# EAGLE board Charge Board.job (EAGLE 6.4)
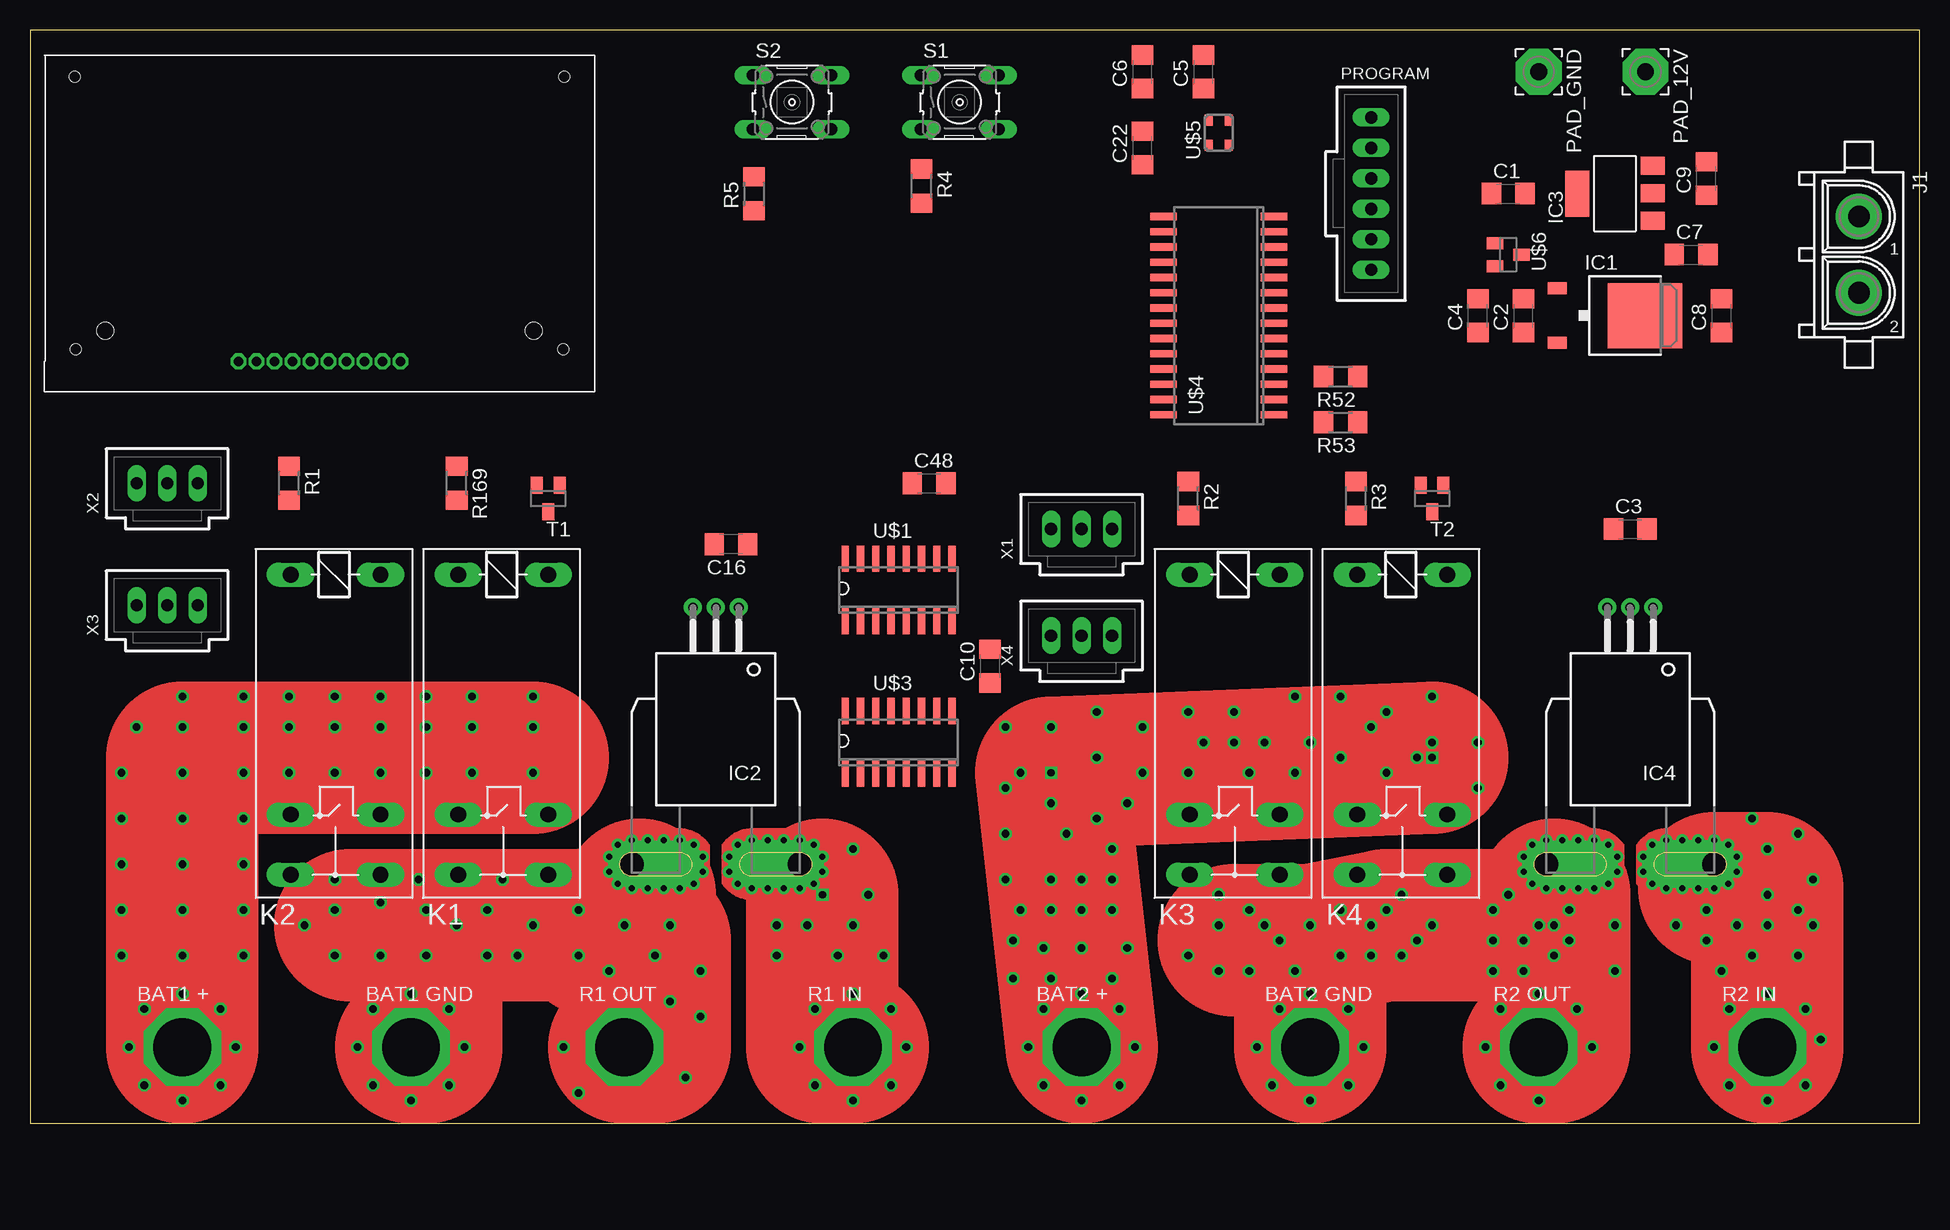
[diagram p0: board, top side]
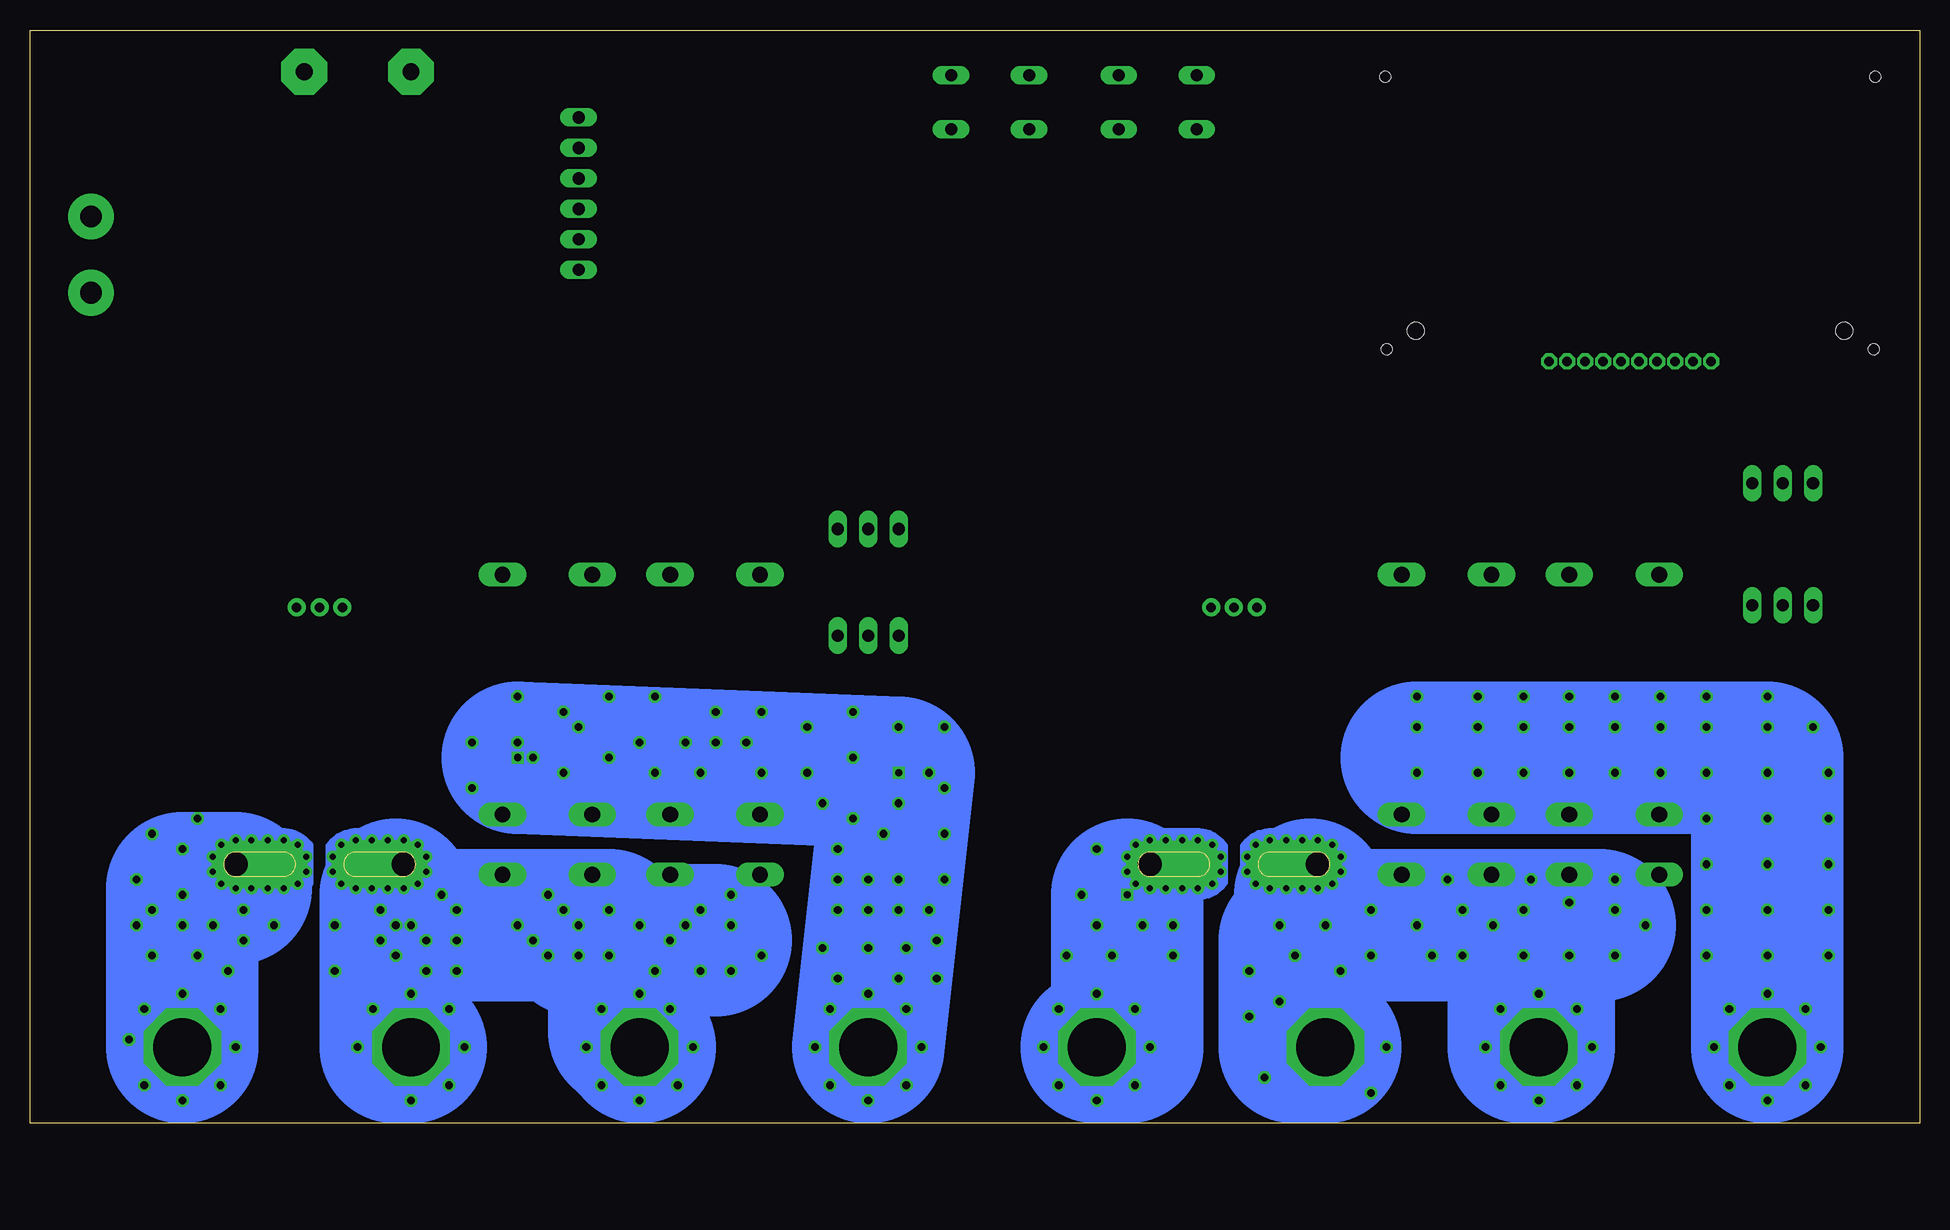
[diagram p1: board, bottom side, seen from below]

Size 157.46 x 91.11 mm. Coordinates in mm from the lower left corner, seen from the top.
Outline: 0,0 157.46,0 157.46,91.11 0,91.11 0,0
Copper layers (1*16): Top 0.035mm / dielectric 1.5mm / Bottom 0.035mm
Design rules "SJ Design Rules": minimum track width 16mil, minimum drill 24mil, track to track 10mil, track to pad 10mil, pad to pad 10mil, via to via 10mil, smd to smd 10mil, copper to edge 40mil, drill to drill 10mil, minimum pad ring 10mil, minimum via ring 8mil, stop-mask expansion 4mil, vias tented up to drill 0mil, thermal gap 20mil

## Footprints (pad centres in the part's own frame; a part is rotated, then mirrored left to right if it is on the bottom)
SOLDERPAD = drill 4.826 pad 6.452 octagon: P$1 0,0
C1206 = smd 1.6 x 1.8: 1 -1.4,0; 2 1.4,0
TO252 = smd 1 x 1.6: 1 -2.28,-4.8; 2 2.28,-4.8 | smd 5.4 x 6.2: 3 0,2.5
CB-PFF = drill 0.8 pad 1.5: 1 -1.91,-21.4; 2 0,-21.4; 3 1.91,-21.4 | drill 2 pad 4 offset: IP+ 7,0; IP- -7,0 | drill 0.5 pad 0.9: IP+@2 8.89,0.635; IP+@3 8.89,-0.635; IP+@4 8.175,-1.625; IP+@5 7,-2; IP+@6 5.675,-2; IP+@7 4.35,-2; IP+@8 3,-2; IP+@9 1.825,-1.625; IP+@10 1.1,-0.625; IP+@11 1.1,0.625; IP+@12 1.825,1.625; IP+@13 3,2; IP+@14 4.35,2; IP+@15 5.675,2; IP+@16 7,2; IP+@17 8.175,1.625; IP-@2 -8.89,0.635; IP-@3 -8.89,-0.635; IP-@4 -8.175,-1.625; IP-@5 -7,-2; IP-@6 -5.675,-2; IP-@7 -4.325,-2; IP-@8 -3,-2; IP-@9 -1.825,-1.625; IP-@10 -1.1,-0.625; IP-@11 -1.1,0.625; IP-@12 -1.825,1.625; IP-@13 -3,2; IP-@14 -4.325,2; IP-@15 -5.675,2; IP-@16 -7,2; IP-@17 -8.175,1.625
SOT223 = smd 1.499 x 2.007: 1 -2.261,-3.15; 2 0.025,-3.15; 3 2.311,-3.15 | smd 3.81 x 2.007: 4 0,3.15
350428-1 = drill 1.8 pad 3.81: 1 -3.175,0; 2 3.175,0
G2REA = drill 1.321 long: 1 -2.54,-3.683; 2 -2.54,3.81; P 17.45,-3.683; P@ 17.45,3.81; S 22.454,-3.683; S@ 22.454,3.81
3,81/1,4 = drill 1.397 pad 3.81 octagon: 1 0,0
70543-06 = drill 1.016 long: 1 -6.35,0; 2 -3.81,0; 3 -1.27,0; 4 1.27,0; 5 3.81,0; 6 6.35,0
R1206 = smd 1.6 x 1.803: 1 -1.422,0; 2 1.422,0
B3F-10XX = drill 1.016 long: 1 -3.251,2.261; 2 3.251,2.261; 3 -3.251,-2.261; 4 3.251,-2.261
SOT23 = smd 1 x 1.4: 1 -0.95,-1.1; 2 0.95,-1.1; 3 0,1.1
SO16 = smd 0.6 x 2.2: 1 -4.445,-2.6; 2 -3.175,-2.6; 3 -1.905,-2.6; 4 -0.635,-2.6; 5 0.635,-2.6; 6 1.905,-2.6; 7 3.175,-2.6; 8 4.445,-2.6; 9 4.445,2.6; 10 3.175,2.6; 11 1.905,2.6; 12 0.635,2.6; 13 -0.635,2.6; 14 -1.905,2.6; 15 -3.175,2.6; 16 -4.445,2.6
LCD_SCREEN = drill 0.8 octagon: 1 -6.75,0; 2 -5.25,0; 3 -3.75,0; 4 -2.25,0; 5 -0.75,0; 6 0.75,0; 7 2.25,0; 8 3.75,0; 9 5.25,0; 10 6.75,0 | hole 0.9: 20.3,1; -20.3,1; 20.4,23.7; -20.4,23.7 | hole 1.4: 17.85,2.55; -17.85,2.55
SO28W = smd 0.6 x 2.2: 1 -8.255,-4.6; 2 -6.985,-4.6; 3 -5.715,-4.6; 4 -4.445,-4.6; 5 -3.175,-4.6; 6 -1.905,-4.6; 7 -0.635,-4.6; 8 0.635,-4.6; 9 1.905,-4.6; 10 3.175,-4.6; 11 4.445,-4.6; 12 5.715,-4.6; 13 6.985,-4.6; 14 8.255,-4.6; 15 8.255,4.6; 16 6.985,4.6; 17 5.715,4.6; 18 4.445,4.6; 19 3.175,4.6; 20 1.905,4.6; 21 0.635,4.6; 22 -0.635,4.6; 23 -1.905,4.6; 24 -3.175,4.6; 25 -4.445,4.6; 26 -5.715,4.6; 27 -6.985,4.6; 28 -8.255,4.6
ASE = smd 0.9 x 0.65: 1 -1.05,-0.825; 2 1.05,-0.825; 3 1.05,0.825; 4 -1.05,0.825
70543-03 = drill 1.016 long: 1 -2.54,0; 2 0,0; 3 2.54,0

## Placement (x,y rotation side)
BAT+_1  BAT1 +  [SOLDERPAD]  12.7,6.35 0 top
BAT+_2  BAT2 +  [SOLDERPAD]  87.63,6.35 0 top
BAT-_1  BAT1 GND  [SOLDERPAD]  31.75,6.35 0 top
BAT-_2  BAT2 GND  [SOLDERPAD]  106.68,6.35 0 top
C1  .3uF  [C1206]  123.19,77.47 0 top
C2  1uF  [C1206]  124.46,67.31 90 top
C3  1uF  [C1206]  133.35,49.53 0 top
C4  1uF  [C1206]  120.65,67.31 90 top
C5  1uF  [C1206]  97.79,87.63 90 top
C6  1uF  [C1206]  92.71,87.63 90 top
C7  1uF  [C1206]  138.43,72.39 0 top
C8  1uF  [C1206]  140.97,67.31 90 top
C9  1uF  [C1206]  139.7,78.74 90 top
C10  1uF  [C1206]  80.01,38.1 90 top
C16  .1uF  [C1206]  58.42,48.26 180 top
C22  1uF  [C1206]  92.71,81.28 90 top
C48  .1uF  [C1206]  74.93,53.34 0 top
IC1  7805DT  [TO252]  132.08,67.31 270 top
IC2  ACS758ECB-200B-PFF-T  [CB-PFF]  57.15,21.59 180 top
IC3  REG1117  [SOT223]  132.08,77.47 90 top
IC4  ACS758ECB-200B-PFF-T  [CB-PFF]  133.35,21.59 180 top
J1  350428-1  [350428-1]  152.4,72.39 270 top
K1  G2REA  [G2REA]  39.37,43.18 270 top
K2  G2REA  [G2REA]  25.4,43.18 270 top
K3  G2REA  [G2REA]  100.33,43.18 270 top
K4  G2REA  [G2REA]  114.3,43.18 270 top
PAD_12V  12v  [3,81/1,4]  134.62,87.63 180 top
PAD_GND  gnd  [3,81/1,4]  125.73,87.63 180 top
PROGRAM  C-GRID-06-70543  [70543-06]  111.76,77.47 270 top
R1  1K  [R1206]  21.59,53.34 270 top
R2  1K  [R1206]  96.52,52.07 270 top
R3  1K  [R1206]  110.49,52.07 270 top
R4  1K  [R1206]  74.3,78.11 270 top
R5  1K  [R1206]  60.33,77.47 90 top
R52  10k\  [R1206]  109.22,62.23 180 top
R53  470  [R1206]  109.22,58.42 180 top
R169  1K  [R1206]  35.56,53.34 270 top
R_IN_1  R1 IN  [SOLDERPAD]  68.58,6.35 0 top
R_IN_2  R2 IN  [SOLDERPAD]  144.78,6.35 0 top
R_OUT_1  R1 OUT  [SOLDERPAD]  49.53,6.35 0 top
R_OUT_2  R2 OUT  [SOLDERPAD]  125.73,6.35 0 top
S1  [B3F-10XX]  77.47,85.09 0 top
S2  [B3F-10XX]  63.5,85.09 0 top
T1  PMV56XN  [SOT23]  43.18,52.07 180 top
T2  PMV56XN  [SOT23]  116.84,52.07 180 top
U$1  MCP-3008  [SO16]  72.39,44.45 0 top
U$2  LCD_SCREEN  [LCD_SCREEN]  24.13,63.5 0 top
U$3  SP720APP  [SO16]  72.39,31.75 0 top
U$4  PIC24HJ128GP-202  [SO28W]  99.06,67.31 90 top
U$5  ASE  [ASE]  99.06,82.55 90 top
U$6  MAX6105  [SOT23]  123.19,72.39 270 top
X1  BAT2 TEMP 1  [70543-03]  87.63,49.53 0 top
X2  BAT1 TEMP1  [70543-03]  11.43,53.34 0 top
X3  BAT1 TEMP2  [70543-03]  11.43,43.18 0 top
X4  BAT2 TEMP2  [70543-03]  87.63,40.64 0 top

## Library data of the parts
BAT+_1 BAT+_2 BAT-_1 BAT-_2 R_IN_1 R_IN_2 R_OUT_1 R_OUT_2 U$1 U$3 U$6 = SolarJackets_Common
C1-C10 C16 C22 C48 R1-R5 R52 R53 R169 = rcl
IC1 = linear
IC2 IC4 = allegro; MPN: ACS758ECB-200B-PFF-T; OC_FARNELL: 1718993; OC_NEWARK: 04R7127
IC3 = burr-brown; MPN: REG1117; OC_FARNELL: 1097566; OC_NEWARK: 14P6981
J1 = con-amp
K1-K4 = relay; OC_FARNELL: unknown; OC_NEWARK: unknown
PAD_12V PAD_GND = wirepad
PROGRAM X1-X4 = con-molex; OC_FARNELL: unknown; OC_NEWARK: unknown
S1 S2 = switch-omron; MPN: B3F-1000; OC_FARNELL: 176432; OC_NEWARK: 36M3542
T1 T2 = SolarJacketsADC; PART_NUM: PMV56XN,215
U$2 = LCD_SCREEN
U$4 = LTC6803
U$5 = crystal; OC_FARNELL: unknown; OC_NEWARK: unknown

## Nets
+3V3: C9.1 C16.1 C48.1 IC3.2 PROGRAM.6 R4.2 R5.1 R52.1 U$2.7 U$4.13 U$4.28 U$5.1 U$5.4
+5V: C3.2 C4.1 C7.1 C10.2 IC1.2 IC2.1 IC4.1 U$1.15 U$1.16 U$3.16 U$6.2 X1.3 X2.3 X3.3 X4.3
+12V: C1.1 C2.1 C8.1 IC1.1 IC3.3 J1.2 PAD_12V.1 R1.2 R2.2 R3.2 R169.2 U$6.1
CH0: IC2.3 U$1.1 U$3.1
CH1: U$1.2 U$3.2 X2.2
CH2: U$1.3 U$3.3 X3.2
CH3: K1.S K1.S@ K2.S K2.S@ R_OUT_1.P$1 U$1.4 U$3.4
CH4: IC4.3 U$1.5 U$3.5
CH5: U$1.6 U$3.6 X1.2
CH6: U$1.7 U$3.7 X4.2
CH7: K3.S K3.S@ K4.S K4.S@ R_OUT_2.P$1 U$1.8 U$3.15
GND: BAT-_1.P$1 BAT-_2.P$1 C1.2 C2.2 C3.1 C4.2 C6.1 C7.2 C8.2 C9.2 C10.1 C16.2 C22.2 C48.2 IC1.3 IC2.2 IC2.IP+ IC2.IP+@2 IC2.IP+@3 IC2.IP+@4 IC2.IP+@5 IC2.IP+@6 IC2.IP+@7 IC2.IP+@8 IC2.IP+@9 IC2.IP+@10 IC2.IP+@11 IC2.IP+@12 IC2.IP+@13 IC2.IP+@14 IC2.IP+@15 IC2.IP+@16 IC2.IP+@17 IC3.1 IC4.2 IC4.IP+ IC4.IP+@2 IC4.IP+@3 IC4.IP+@4 IC4.IP+@5 IC4.IP+@6 IC4.IP+@7 IC4.IP+@8 IC4.IP+@9 IC4.IP+@10 IC4.IP+@11 IC4.IP+@12 IC4.IP+@13 IC4.IP+@14 IC4.IP+@15 IC4.IP+@16 IC4.IP+@17 J1.1 PAD_GND.1 PROGRAM.5 R52.2 R53.1 S1.1 S1.2 S2.1 S2.2 T1.2 T2.2 U$1.9 U$1.14 U$2.6 U$3.8 U$4.8 U$4.19 U$4.27 U$5.2 U$6.3 X1.1 X2.1 X3.1 X4.1
MCLR: PROGRAM.4 R53.2 U$4.1
N$1: K1.2 K2.2 T1.3
N$2: K2.1 R1.1
N$3: BAT+_2.P$1 K3.P K3.P@ K4.P K4.P@
N$4: K3.1 R2.1
N$5: K3.2 K4.2 T2.3
N$6: K4.1 R3.1
N$7: IC4.IP- IC4.IP-@2 IC4.IP-@3 IC4.IP-@4 IC4.IP-@5 IC4.IP-@6 IC4.IP-@7 IC4.IP-@8 IC4.IP-@9 IC4.IP-@10 IC4.IP-@11 IC4.IP-@12 IC4.IP-@13 IC4.IP-@14 IC4.IP-@15 IC4.IP-@16 IC4.IP-@17 R_IN_2.P$1
N$13: IC2.IP- IC2.IP-@2 IC2.IP-@3 IC2.IP-@4 IC2.IP-@5 IC2.IP-@6 IC2.IP-@7 IC2.IP-@8 IC2.IP-@9 IC2.IP-@10 IC2.IP-@11 IC2.IP-@12 IC2.IP-@13 IC2.IP-@14 IC2.IP-@15 IC2.IP-@16 IC2.IP-@17 R_IN_1.P$1
N$20: C6.2 U$2.8
N$21: C5.2 U$2.9
N$22: C5.1 U$2.10
N$48: C22.1 U$4.20
N$172: K1.1 R169.1
N$278: BAT+_1.P$1 K1.P K1.P@ K2.P K2.P@
OSC1: PROGRAM.1 U$4.9 U$5.3
PGEC1: PROGRAM.2 U$4.5
PGED1: PROGRAM.3 U$4.4
RA0: U$4.2
RA1: U$4.3
RA3: U$4.10
RA4: U$4.12
RB2: R5.2 S2.3 S2.4 U$4.6
RB3: R4.1 S1.3 S1.4 U$4.7
RB4: T2.1 U$4.11
RB5: T1.1 U$4.14
RB6: U$1.13 U$4.15
RB7: U$1.12 U$4.16
RB8: U$1.11 U$4.17
RB9: U$1.10 U$4.18
RB10: U$2.5 U$4.21
RB11: U$2.4 U$4.22
RB12: U$2.3 U$4.23
RB13: U$2.2 U$4.24
RB14: U$2.1 U$4.25
RB15: U$4.26

## Tracks (layer width: path | path; a pad name or v marks a point on that pad's centre or on a via)
CH3  (via drill 0.64)
  Top 12.7: R_OUT_1.P$1 52.07,6.35 v52.07,13.97 52.07,15.24 46.99,15.24 45.72,16.51 | 45.72,16.51 39.37,16.51 | 45.72,16.51 48.26,16.51 50.8,19.05
  Bottom 12.7: R_OUT_1.P$1 52.07,6.35 v52.07,13.97 52.07,15.24
CH7  (via drill 0.64)
  Top 12.7: 127,19.05 v127,13.97 127,6.35 R_OUT_2.P$1
  Bottom 12.7: 127,6.35 v127,13.97 | 127,19.05 v127,13.97 | v127,13.97 127,7.62 R_OUT_2.P$1
GND  (via drill 0.64)
  Top 12.7: 33.02,16.51 26.67,16.51 | 33.02,16.51 v33.02,13.97 33.02,6.35 BAT-_1.P$1 | 33.02,16.51 v35.56,16.51 38.73,16.51 | BAT-_2.P$1 v106.68,10.79 106.68,15.24 | 106.68,15.24 v104.14,15.24 100.33,15.24 | 106.68,15.24 113.03,16.51 v127,16.51
  Bottom 12.7: 31.75,16.51 v35.56,16.51 v49.53,16.51 50.8,16.51 50.8,19.05 | 26.67,16.51 31.75,16.51 | 31.75,16.51 v31.75,10.79 BAT-_1.P$1 33.02,6.35 33.02,11.43 | 100.33,15.24 v104.14,15.24 107.95,15.24 | 107.95,15.24 110.49,15.24 | 110.49,15.24 111.76,15.24 113.03,16.51 v111.76,16.51 | v111.76,16.51 109.22,16.51 107.95,15.24 | 107.95,15.24 107.95,7.62 BAT-_2.P$1 | v127,16.51 v111.76,16.51 | v111.76,16.51 110.49,15.24
N$3  (via drill 0.6)
  Top 12.7: BAT+_2.P$1 v85.09,29.21 v116.84,30.48
  Bottom 12.7: BAT+_2.P$1 v85.09,29.21 v116.84,30.48
N$7  (via drill 0.64)
  Top 12.7: IC4.IP-@16 144.78,19.59 v144.78,19.05 v144.78,16.51 v144.78,10.79 R_IN_2.P$1
  Bottom 12.7: IC4.IP-@16 144.78,19.59 v144.78,19.05 v144.78,16.51 v144.78,10.79 R_IN_2.P$1
N$8  (via drill 0.64)
  other vias: 7.62,13.97
N$9  (via drill 0.64)
  other vias: 17.78,13.97
N$10  (via drill 0.64)
  other vias: 17.78,17.78
N$11  (via drill 0.64)
  other vias: 7.62,17.78
N$12  (via drill 0.64)
  other vias: 7.62,21.59
N$13  (via drill 0.6)
  Top 12.7: v66.04,19.05 66.04,6.35 R_IN_1.P$1
  Bottom 12.7: v66.04,19.05 66.04,6.35 R_IN_1.P$1
N$14  (via drill 0.64)
  other vias: 17.78,21.59
N$15  (via drill 0.64)
  other vias: 17.78,25.4
N$16  (via drill 0.64)
  other vias: 7.62,25.4
N$17  (via drill 0.64)
  other vias: 7.62,29.21
N$18  (via drill 0.64)
  other vias: 12.7,35.56
N$19  (via drill 0.64)
  other vias: 17.78,29.21
N$23  (via drill 0.64)
  other vias: 17.78,35.56
N$24  (via drill 0.64)
  other vias: 17.78,33.02
N$25  (via drill 0.64)
  other vias: 12.7,33.02
N$26  (via drill 0.64)
  other vias: 8.89,33.02
N$27  (via drill 0.64)
  other vias: 21.59,29.21
N$28  (via drill 0.64)
  other vias: 21.59,33.02
N$29  (via drill 0.64)
  other vias: 21.59,35.56
N$30  (via drill 0.64)
  other vias: 25.4,35.56
N$31  (via drill 0.64)
  other vias: 25.4,33.02
N$32  (via drill 0.64)
  other vias: 25.4,29.21
N$33  (via drill 0.64)
  other vias: 29.21,29.21
N$34  (via drill 0.64)
  other vias: 29.21,33.02
N$35  (via drill 0.64)
  other vias: 29.21,35.56
N$36  (via drill 0.64)
  other vias: 33.02,35.56
N$37  (via drill 0.64)
  other vias: 33.02,33.02
N$38  (via drill 0.64)
  other vias: 33.02,29.21
N$39  (via drill 0.64)
  other vias: 36.83,35.56
N$40  (via drill 0.64)
  other vias: 36.83,33.02
N$41  (via drill 0.64)
  other vias: 36.83,29.21
N$42  (via drill 0.64)
  other vias: 41.91,35.56
N$43  (via drill 0.64)
  other vias: 41.91,33.02
N$44  (via drill 0.64)
  other vias: 41.91,29.21
N$45  (via drill 0.64)
  other vias: 25.4,20.32
N$46  (via drill 0.64)
  other vias: 25.4,17.78
N$47  (via drill 0.64)
  other vias: 25.4,13.97
N$49  (via drill 0.64)
  other vias: 22.86,16.51
N$50  (via drill 0.64)
  other vias: 15.88,9.53
N$51  (via drill 0.64)
  other vias: 17.14,6.35
N$52  (via drill 0.64)
  other vias: 15.88,3.17
N$53  (via drill 0.64)
  other vias: 12.7,1.91
N$54  (via drill 0.64)
  other vias: 9.53,3.17
N$55  (via drill 0.64)
  other vias: 8.26,6.35
N$56  (via drill 0.64)
  other vias: 9.53,9.53
N$57  (via drill 0.64)
  other vias: 39.37,20.32
N$58  (via drill 0.64)
  other vias: 32.38,20.32
N$59  (via drill 0.64)
  other vias: 29.21,18.41
N$60  (via drill 0.64)
  other vias: 29.21,13.97
N$61  (via drill 0.64)
  other vias: 33.02,17.78
N$62  (via drill 0.64)
  other vias: 38.1,17.78
N$63  (via drill 0.64)
  other vias: 38.1,13.97
N$64  (via drill 0.64)
  other vias: 41.91,16.51
N$65  (via drill 0.64)
  other vias: 40.64,13.97
N$66  (via drill 0.64)
  other vias: 34.92,9.53
N$67  (via drill 0.64)
  other vias: 28.57,9.53
N$68  (via drill 0.64)
  other vias: 27.3,6.35
N$69  (via drill 0.64)
  other vias: 28.57,3.17
N$70  (via drill 0.64)
  other vias: 31.75,1.91
N$71  (via drill 0.64)
  other vias: 34.92,3.17
N$72  (via drill 0.64)
  other vias: 36.2,6.35
N$73  (via drill 0.64)
  other vias: 45.72,17.78
N$74  (via drill 0.64)
  other vias: 45.72,13.97
N$75  (via drill 0.64)
  other vias: 48.26,12.7
N$76  (via drill 0.64)
  other vias: 53.34,16.51
N$77  (via drill 0.64)
  other vias: 55.88,12.7
N$78  (via drill 0.64)
  other vias: 55.88,8.89
N$79  (via drill 0.64)
  other vias: 53.34,10.16
N$80  (via drill 0.64)
  other vias: 54.61,3.81
N$81  (via drill 0.64)
  other vias: 45.72,2.54
N$82  (via drill 0.64)
  other vias: 44.45,6.35
N$83  (via drill 0.64)
  other vias: 62.23,16.51
N$84  (via drill 0.64)
  other vias: 64.77,16.51
N$85  (via drill 0.64)
  other vias: 68.58,16.51
N$86  (via drill 0.64)
  other vias: 69.85,19.05
N$87  (via drill 0.64)
  other vias: 68.58,22.86
N$88  (via drill 0.64)
  other vias: 71.12,13.97
N$89  (via drill 0.64)
  other vias: 67.31,13.97
N$90  (via drill 0.64)
  other vias: 62.23,13.97
N$91  (via drill 0.64)
  other vias: 68.58,10.79
N$92  (via drill 0.64)
  other vias: 65.41,9.53
N$93  (via drill 0.64)
  other vias: 64.14,6.35
N$94  (via drill 0.64)
  other vias: 65.41,3.17
N$95  (via drill 0.64)
  other vias: 68.58,1.91
N$96  (via drill 0.64)
  other vias: 71.75,3.17
N$97  (via drill 0.64)
  other vias: 73.03,6.35
N$98  (via drill 0.64)
  other vias: 71.75,9.53
N$99  (via drill 0.64)
  other vias: 84.45,9.53
N$100  (via drill 0.64)
  other vias: 87.63,10.79
N$101  (via drill 0.64)
  other vias: 90.81,9.53
N$102  (via drill 0.64)
  other vias: 92.08,6.35
N$103  (via drill 0.64)
  other vias: 90.81,3.17
N$104  (via drill 0.64)
  other vias: 87.63,1.91
N$105  (via drill 0.64)
  other vias: 84.45,3.17
N$106  (via drill 0.64)
  other vias: 83.19,6.35
N$107  (via drill 0.64)
  other vias: 106.68,1.91
N$108  (via drill 0.64)
  other vias: 109.86,3.17
N$109  (via drill 0.64)
  other vias: 111.12,6.35
N$110  (via drill 0.64)
  other vias: 109.86,9.53
N$111  (via drill 0.64)
  other vias: 104.14,9.53
N$112  (via drill 0.64)
  other vias: 102.23,6.35
N$113  (via drill 0.64)
  other vias: 103.5,3.17
N$114  (via drill 0.64)
  other vias: 130.18,6.35
N$115  (via drill 0.64)
  other vias: 128.91,9.53
N$116  (via drill 0.64)
  other vias: 125.73,10.79
N$117  (via drill 0.64)
  other vias: 122.56,9.53
N$118  (via drill 0.64)
  other vias: 121.28,6.35
N$119  (via drill 0.64)
  other vias: 122.56,3.17
N$120  (via drill 0.64)
  other vias: 125.73,1.91
N$121  (via drill 0.64)
  other vias: 141.6,9.53
N$122  (via drill 0.64)
  other vias: 140.34,6.35
N$123  (via drill 0.64)
  other vias: 141.6,3.17
N$124  (via drill 0.64)
  other vias: 144.78,1.91
N$125  (via drill 0.64)
  other vias: 147.96,3.17
N$126  (via drill 0.64)
  other vias: 149.22,6.99
N$127  (via drill 0.64)
  other vias: 147.96,9.53
N$128  (via drill 0.64)
  other vias: 81.92,12.06
N$129  (via drill 0.64)
  other vias: 85.09,12.06
N$130  (via drill 0.64)
  other vias: 90.17,12.06
N$131  (via drill 0.64)
  other vias: 91.44,14.61
N$132  (via drill 0.64)
  other vias: 87.63,14.61
N$133  (via drill 0.64)
  other vias: 84.45,14.61
N$134  (via drill 0.64)
  other vias: 81.92,15.24
N$135  (via drill 0.64)
  other vias: 82.55,17.78
N$136  (via drill 0.64)
  other vias: 85.09,17.78
N$137  (via drill 0.64)
  other vias: 87.63,17.78
N$138  (via drill 0.64)
  other vias: 90.17,17.78
N$139  (via drill 0.64)
  other vias: 90.17,20.32
N$140  (via drill 0.64)
  other vias: 87.63,20.32
N$141  (via drill 0.64)
  other vias: 85.09,20.32
N$142  (via drill 0.64)
  other vias: 81.28,20.32
N$143  (via drill 0.64)
  other vias: 81.28,24.13
N$144  (via drill 0.64)
  other vias: 86.36,24.13
N$145  (via drill 0.64)
  other vias: 90.17,22.86
N$146  (via drill 0.64)
  other vias: 88.9,25.4
N$147  (via drill 0.64)
  other vias: 85.09,26.67
N$148  (via drill 0.64)
  other vias: 82.55,29.21
N$149  (via drill 0.64)
  other vias: 81.28,27.94
N$150  (via drill 0.64)
  other vias: 85.09,33.02
N$151  (via drill 0.64)
  other vias: 81.28,33.02
N$152  (via drill 0.64)
  other vias: 88.9,30.48
N$153  (via drill 0.64)
  other vias: 88.9,34.29
N$154  (via drill 0.64)
  other vias: 91.44,26.67
N$155  (via drill 0.64)
  other vias: 92.71,33.02
N$156  (via drill 0.64)
  other vias: 92.71,29.21
N$157  (via drill 0.64)
  other vias: 97.79,31.75
N$158  (via drill 0.64)
  other vias: 96.52,34.29
N$159  (via drill 0.64)
  other vias: 96.52,29.21
N$160  (via drill 0.64)
  other vias: 101.6,29.21
N$161  (via drill 0.64)
  other vias: 100.33,34.29
N$162  (via drill 0.64)
  other vias: 105.41,35.56
N$163  (via drill 0.64)
  other vias: 102.87,31.75
N$164  (via drill 0.64)
  other vias: 100.33,31.75
N$165  (via drill 0.64)
  other vias: 105.41,29.21
N$166  (via drill 0.64)
  other vias: 109.22,30.48
N$167  (via drill 0.64)
  other vias: 109.22,35.56
N$168  (via drill 0.64)
  other vias: 116.84,35.56
N$169  (via drill 0.64)
  other vias: 120.65,31.75
N$170  (via drill 0.64)
  other vias: 120.65,27.94
N$171  (via drill 0.64)
  other vias: 116.84,31.75
N$173  (via drill 0.64)
  other vias: 113.03,29.21
N$174  (via drill 0.64)
  other vias: 115.57,30.48
N$175  (via drill 0.64)
  other vias: 111.76,33.02
N$176  (via drill 0.64)
  other vias: 113.03,34.29
N$177  (via drill 0.64)
  other vias: 106.68,31.75
N$178  (via drill 0.64)
  other vias: 99.06,12.7
N$179  (via drill 0.64)
  other vias: 99.06,16.51
N$180  (via drill 0.64)
  other vias: 99.06,19.05
N$181  (via drill 0.64)
  other vias: 101.6,17.78
N$182  (via drill 0.64)
  other vias: 102.87,16.51
N$183  (via drill 0.64)
  other vias: 101.6,12.7
N$184  (via drill 0.64)
  other vias: 109.22,13.97
N$185  (via drill 0.64)
  other vias: 114.3,13.97
N$186  (via drill 0.64)
  other vias: 115.57,15.24
N$187  (via drill 0.64)
  other vias: 114.3,19.05
N$188  (via drill 0.64)
  other vias: 113.03,17.78
N$189  (via drill 0.64)
  other vias: 106.68,16.51
N$190  (via drill 0.64)
  other vias: 109.22,17.78
N$191  (via drill 0.64)
  other vias: 111.76,13.97
N$192  (via drill 0.64)
  other vias: 105.41,12.7
N$193  (via drill 0.64)
  other vias: 96.52,13.97
N$194  (via drill 0.64)
  other vias: 116.84,16.51
N$195  (via drill 0.64)
  other vias: 124.46,12.7
N$196  (via drill 0.64)
  other vias: 121.92,12.7
N$197  (via drill 0.64)
  other vias: 121.92,15.24
N$198  (via drill 0.64)
  other vias: 123.19,19.05
N$199  (via drill 0.64)
  other vias: 121.92,17.78
N$200  (via drill 0.64)
  other vias: 128.27,15.24
N$201  (via drill 0.64)
  other vias: 132.08,12.7
N$202  (via drill 0.64)
  other vias: 132.08,16.51
N$203  (via drill 0.64)
  other vias: 128.27,17.78
N$204  (via drill 0.64)
  other vias: 125.73,16.51
N$205  (via drill 0.64)
  other vias: 124.46,15.24
N$206  (via drill 0.64)
  other vias: 140.97,12.7
N$207  (via drill 0.64)
  other vias: 139.7,15.24
N$208  (via drill 0.64)
  other vias: 137.16,16.51
N$209  (via drill 0.64)
  other vias: 139.7,17.78
N$210  (via drill 0.64)
  other vias: 143.51,13.97
N$211  (via drill 0.64)
  other vias: 147.32,13.97
N$212  (via drill 0.64)
  other vias: 148.59,16.51
N$213  (via drill 0.64)
  other vias: 142.24,16.51
N$214  (via drill 0.64)
  other vias: 144.78,22.86
N$215  (via drill 0.64)
  other vias: 143.51,25.4
N$216  (via drill 0.64)
  other vias: 147.32,24.13
N$217  (via drill 0.64)
  other vias: 148.59,20.32
N$218  (via drill 0.64)
  other vias: 147.32,17.78
N$278  (via drill 0.64)
  Top 12.7: BAT+_1.P$1 v12.7,10.79 v12.7,13.97 v12.7,17.78 v12.7,21.59 v12.7,25.4 v12.7,29.21 12.7,30.48 41.91,30.48
  Bottom 12.7: BAT+_1.P$1 v12.7,10.79 v12.7,13.97 v12.7,17.78 v12.7,21.59 v12.7,25.4 v12.7,29.21 12.7,30.48 41.91,30.48